# EAGLE board kitPCB (EAGLE 7.7.0)
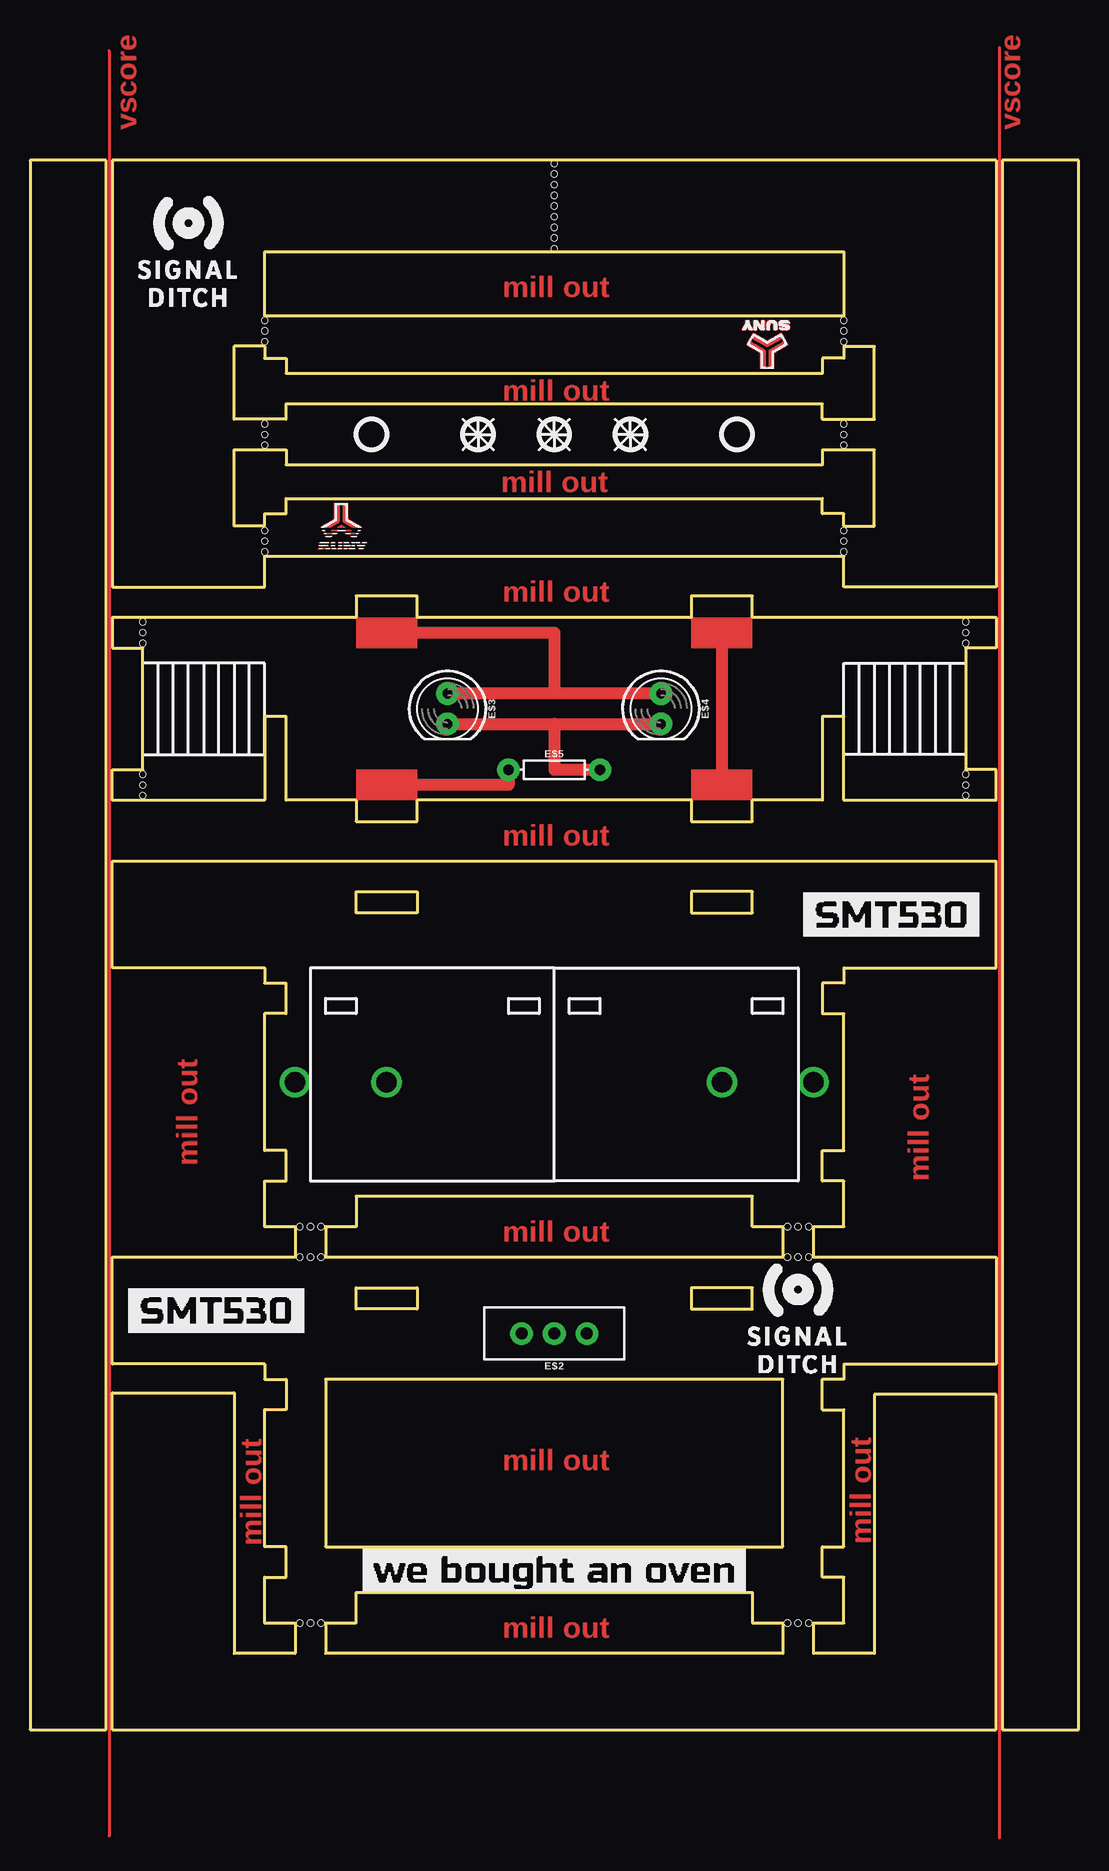
[diagram p0: board, top side]
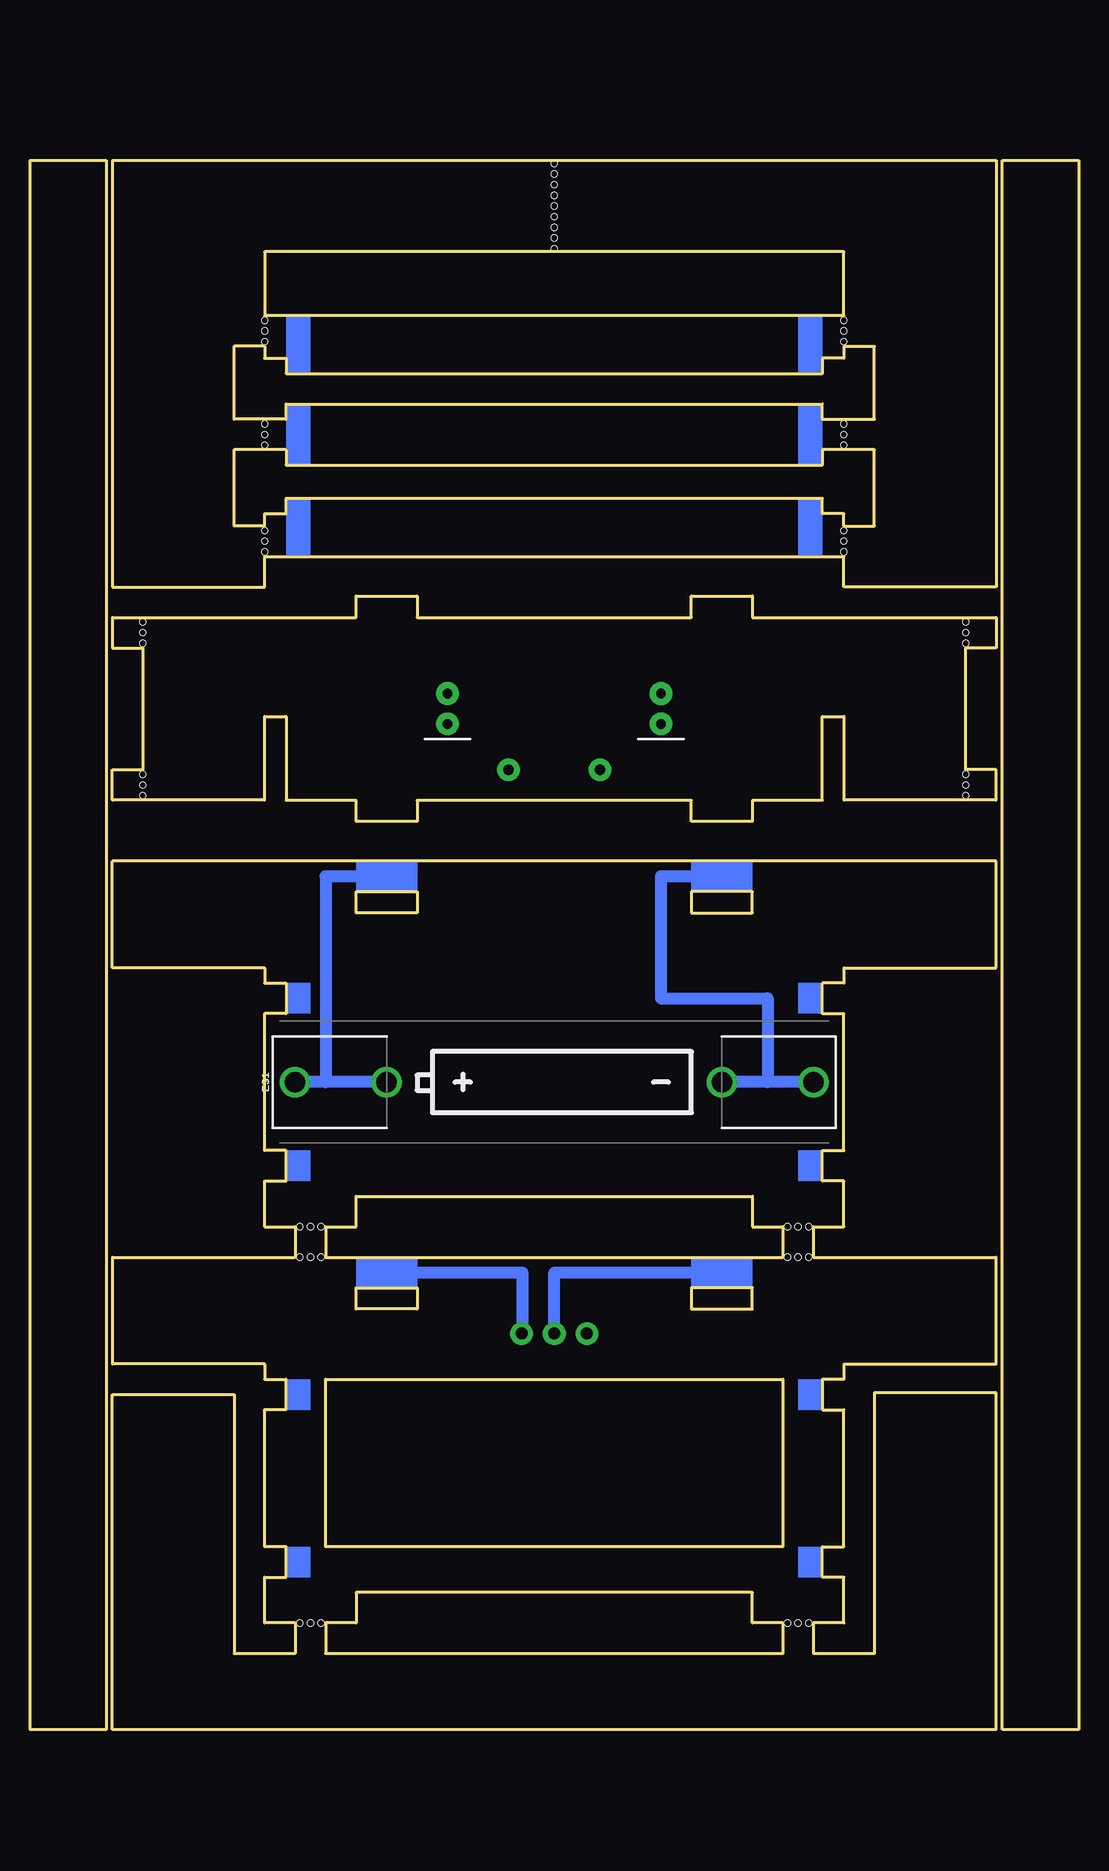
[diagram p1: board, bottom side, seen from below]

Size 87.38 x 130.81 mm. Coordinates in mm from the lower left corner, seen from the top.
Outline: 19.56,63.5 6.86,63.5 6.86,72.39 80.52,72.39 80.52,63.5 67.82,63.5 67.82,62.23 66.04,62.23 66.04,59.69 67.82,59.69 67.82,48.26 66.04,48.26 66.04,45.72 67.82,45.72 67.82,41.91 65.28,41.91 65.28,39.37 80.52,39.37 80.52,30.48 67.82,30.48 67.82,29.21 66.04,29.21 66.04,26.67 67.82,26.67 67.82,15.24 66.04,15.24 66.04,12.7 67.82,12.7 67.82,8.89 65.28,8.89 65.28,6.35 70.36,6.35 70.36,27.94 80.52,27.94 80.52,0 6.86,0 6.86,28.07 17.02,28.07 17.02,6.35 22.1,6.35 22.1,8.89 19.56,8.89 19.56,12.7 21.34,12.7 21.34,15.24 19.56,15.24 19.56,26.67 21.34,26.67 21.34,29.21 19.56,29.21 19.56,30.48 6.86,30.48 6.86,39.37 22.1,39.37 22.1,41.91 19.56,41.91 19.56,45.72 21.34,45.72 21.34,48.26 19.56,48.26 19.56,59.69 21.34,59.69 21.34,62.23 19.56,62.23 19.56,63.5
Outline: 62.74,41.91 60.2,41.91 60.2,44.45 27.18,44.45 27.18,41.91 24.64,41.91 24.64,39.37 62.74,39.37 62.74,41.91
Outline: 9.4,80.01 9.4,90.17 6.86,90.17 6.86,92.71 27.18,92.71 27.18,94.49 32.26,94.49 32.26,92.71 55.12,92.71 55.12,94.49 60.2,94.49 60.2,92.71 80.52,92.71 80.52,90.17 77.98,90.17 77.98,80.01 80.52,80.01 80.52,77.47 67.82,77.47 67.82,84.45 66.04,84.45 66.04,77.47 60.2,77.47 60.2,75.69 55.12,75.69 55.12,77.47 32.26,77.47 32.26,75.69 27.18,75.69 27.18,77.47 21.34,77.47 21.34,84.45 19.56,84.45 19.56,77.47 6.86,77.47 6.86,80.01 9.4,80.01
Outline: 27.18,69.85 32.26,69.85 32.26,68.07 27.18,68.07 27.18,69.85
Outline: 60.2,69.85 55.12,69.85 55.12,68.07 60.2,68.07 60.2,69.85
Outline: 24.64,8.89 27.18,8.89 27.18,11.43 60.2,11.43 60.2,8.89 62.74,8.89 62.74,6.35 24.64,6.35 24.64,8.89
Outline: 60.2,36.83 55.12,36.83 55.12,35.05 60.2,35.05 60.2,36.83
Outline: 27.18,36.83 32.26,36.83 32.26,35.05 27.18,35.05 27.18,36.83
Outline: 66.04,109.22 66.04,110.49 21.34,110.49 21.34,109.22 17.02,109.22 17.02,115.32 19.56,115.32 19.56,114.3 21.34,114.3 21.34,113.03 66.04,113.03 66.04,114.3 67.82,114.3 67.82,115.32 70.36,115.32 70.36,109.22 66.04,109.22
Outline: 66.04,106.68 66.04,105.41 21.34,105.41 21.34,106.68 17.02,106.68 17.02,100.33 19.56,100.33 19.56,101.35 21.34,101.35 21.34,102.62 66.04,102.62 66.04,101.35 67.82,101.35 67.82,100.33 70.36,100.33 70.36,106.68 66.04,106.68
Outline: 67.82,97.79 19.56,97.79 19.56,95.25 6.86,95.25 6.86,130.81 80.52,130.81 80.52,95.25 67.82,95.25 67.82,97.79
Outline: 24.64,29.21 24.64,15.24 62.74,15.24 62.74,29.21 24.64,29.21
Outline: 87.38,0 87.38,130.81 81.03,130.81 81.03,0 87.38,0
Outline: 6.35,130.81 0,130.81 0,0 6.35,0 6.35,130.81
Outline: 19.56,117.86 67.82,117.86 67.82,123.19 19.56,123.19 19.56,117.86
Copper layers (1*16): Top 0.035mm / dielectric 1.5mm / Bottom 0.035mm
Design rules "default": minimum track width 10mil, minimum drill 0.6mm, track to track 8mil, track to pad 8mil, pad to pad 8mil, via to via 8mil, smd to smd 8mil, copper to edge 40mil, drill to drill 8mil, minimum pad ring 10mil, minimum via ring 8mil, stop-mask expansion 4mil, vias tented up to drill 0mil, thermal gap 10mil
Holes 0.51 mm at 23.37,8.89 24.26,8.89 22.48,8.89 64.01,8.89 64.9,8.89 63.12,8.89 23.37,39.37 24.26,39.37 22.48,39.37 23.37,41.91 24.26,41.91 22.48,41.91 64.01,39.37 64.9,39.37 63.12,39.37 63.12,41.91 64.9,41.91 64.01,41.91 9.4,91.44 9.4,78.74 9.4,92.33 9.4,90.55 9.4,79.63 9.4,77.85 77.98,78.74 77.98,79.63 77.98,77.85 77.98,91.44 77.98,92.33 77.98,90.55 19.56,107.95 19.56,99.06 67.82,99.06 67.82,107.95 19.56,108.84 19.56,107.06 19.56,99.95 19.56,98.17 67.82,98.17 67.82,99.95 67.82,108.84 67.82,107.06 67.82,116.59 19.56,116.59 67.82,115.7 67.82,117.47 19.56,117.47 19.56,115.7 43.69,127 43.69,127.89 43.69,126.11 43.69,125.22 43.69,124.33 43.69,123.44 43.69,128.78 43.69,129.67 43.69,130.56

## Footprints (pad centres in the part's own frame; a part is rotated, then mirrored left to right if it is on the bottom)
BATTERY-AAA-KIT = drill 1.702: GND@1 21.59,0; GND@2 13.97,0; PWR@1 -21.59,0; PWR@2 -13.97,0
SWITCH_SPDT_PTH_11.6X4.0MM_KIT = drill 1.016 pad 1.88: 1 0,2.718; 2 0,0; 3 0,-2.718
LED_5MM-KIT = drill 0.813 pad 1.88: A -1.27,0; K 1.27,0
AXIAL-0.3EZ = drill 0.9 pad 1.88: P$1 -3.81,0; P$2 3.81,0

## Placement (x,y rotation side)
E$1  [BATTERY-AAA-KIT]  43.69,53.98 0 bottom
E$2  [SWITCH_SPDT_PTH_11.6X4.0MM_KIT]  43.69,33.02 90 top
E$3  [LED_5MM-KIT]  34.8,85.09 270 top
E$4  [LED_5MM-KIT]  52.58,85.09 270 top
E$5  [AXIAL-0.3EZ]  43.69,80.01 0 top
E$6  [1224862#LOGO#JPG]  26.04,100.2 0 top
E$7  [SIGDITCHICO#PNG]  13.21,123.19 0 top
E$8  [SIGDITCHICO#PNG]  64.01,34.29 0 top
E$9  [SMT530]  63.37,67.94 0 top
E$10  [SMT530]  7.11,34.92 0 top
E$11  [WE_BOUGHT_AN_OVEN]  26.54,13.34 0 top
E$12  [1224862#LOGO#JPG]  61.34,115.44 180 top

## Library data of the parts
E$1 = SparkFun-Batteries
E$2 = SparkFun-Switches
E$3 E$4 = SparkFun-LED
E$5 = SparkFun-Resistors
E$6 E$12 = 1224862#logo#jpg (1)
E$7 E$8 = sigditchico#png
E$9 E$10 = buzzard_labels (20)
E$11 = buzzard_labels (21)

## Nets
S$1: E$1.PWR@1 E$1.PWR@2
S$3: E$2.2
S$6: E$3.K E$4.K E$5.P$2
S$7: E$3.A E$4.A
S$8: E$5.P$1
S$13: E$1.GND@2

## Tracks (layer width: path | path; a pad name or v marks a point on that pad's centre or on a via)
S$1
  Bottom 1.016: 57.66,71.12 62.74,71.12 62.74,53.98 | E$1.PWR@2 62.74,53.98 | 62.74,53.98 E$1.PWR@1
S$2
  Bottom 1.016: 57.66,38.1 46.35,38.1 46.35,33.02
S$3
  Bottom 1.016: E$2.2 43.69,38.1 29.72,38.1
S$5
  Top 1.016: 57.66,91.44 57.66,78.74
S$6
  Top 1.016: E$3.K 43.69,83.82 | 43.69,83.82 E$4.K | 43.69,83.82 43.69,80.01 E$5.P$2
S$7
  Top 1.016: E$4.A 43.69,86.36 | 43.69,86.36 E$3.A | 29.72,91.44 43.69,91.44 43.69,86.36
S$8
  Top 1.016: E$5.P$1 39.88,78.74 29.72,78.74
S$10
  Top 0.254: 6.6,139.95 6.6,-8.89
S$13
  Bottom 1.016: 29.72,71.12 34.8,71.12 34.8,60.96 25.91,60.96 25.91,53.98 | 21.97,53.98 25.91,53.98 | 25.91,53.98 E$1.GND@2
S$14
  Top 0.254: 80.77,140.21 80.77,-9.02
(copper drawn outside any net)
  shapes: Bottom area x18, Top area x4

## Text on the board
Top: vscore | vscore | mill out | mill out | mill out | mill out | mill out | mill out | mill out | mill out | mill out | mill out | mill out | mill out